# Altium PCB 20180623.PcbDoc (part 1 of 2)
Units mil, origin at the board's own origin, x right, y up, seen from the top; angles counter-clockwise.
Board outline 4375.58 x 1725.58 mil, 2 copper layers (Top Layer, Bottom Layer); 68 components, 90 nets, 323 pads, 77 vias.
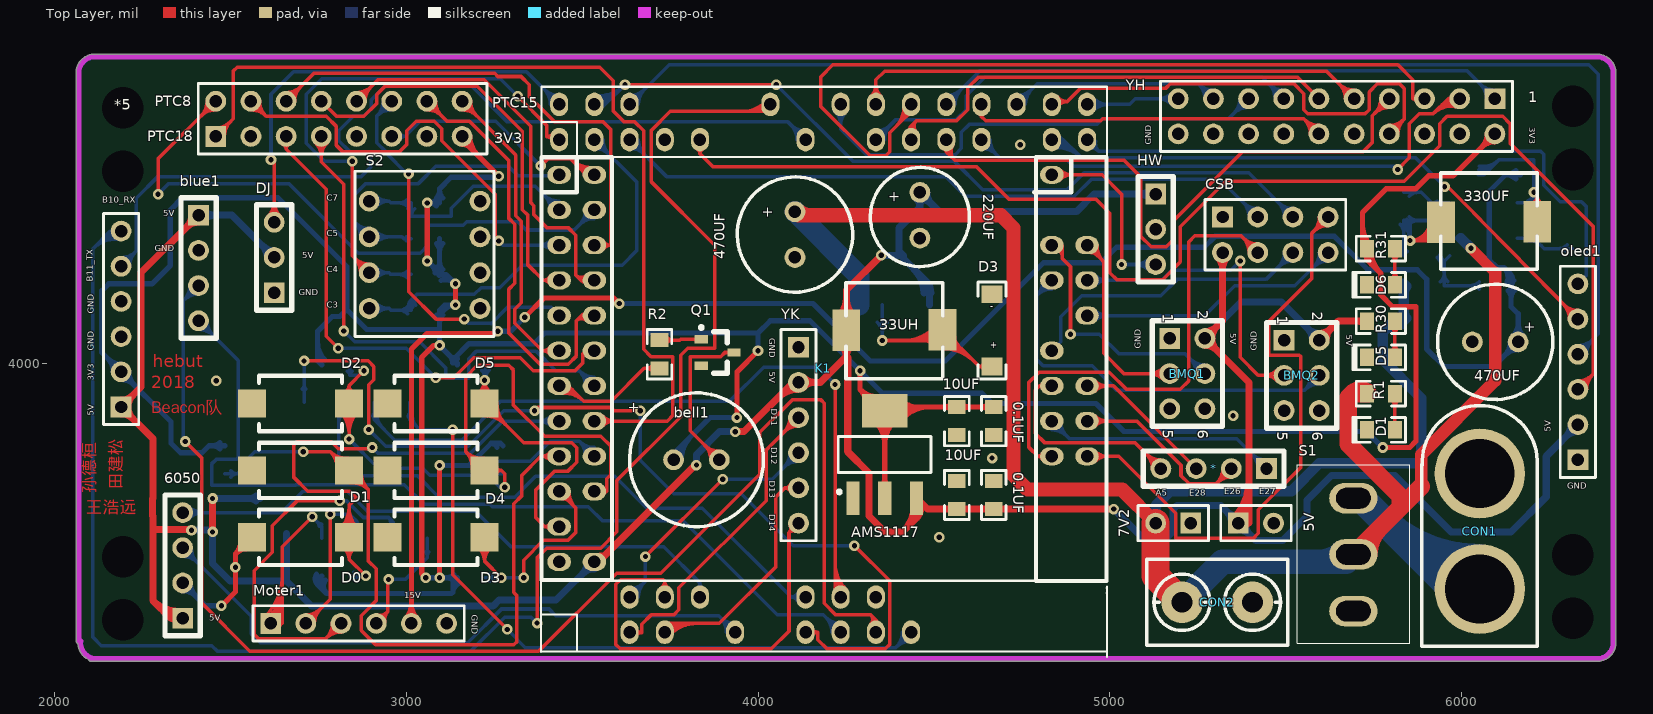
[diagram p0: Top Layer view]
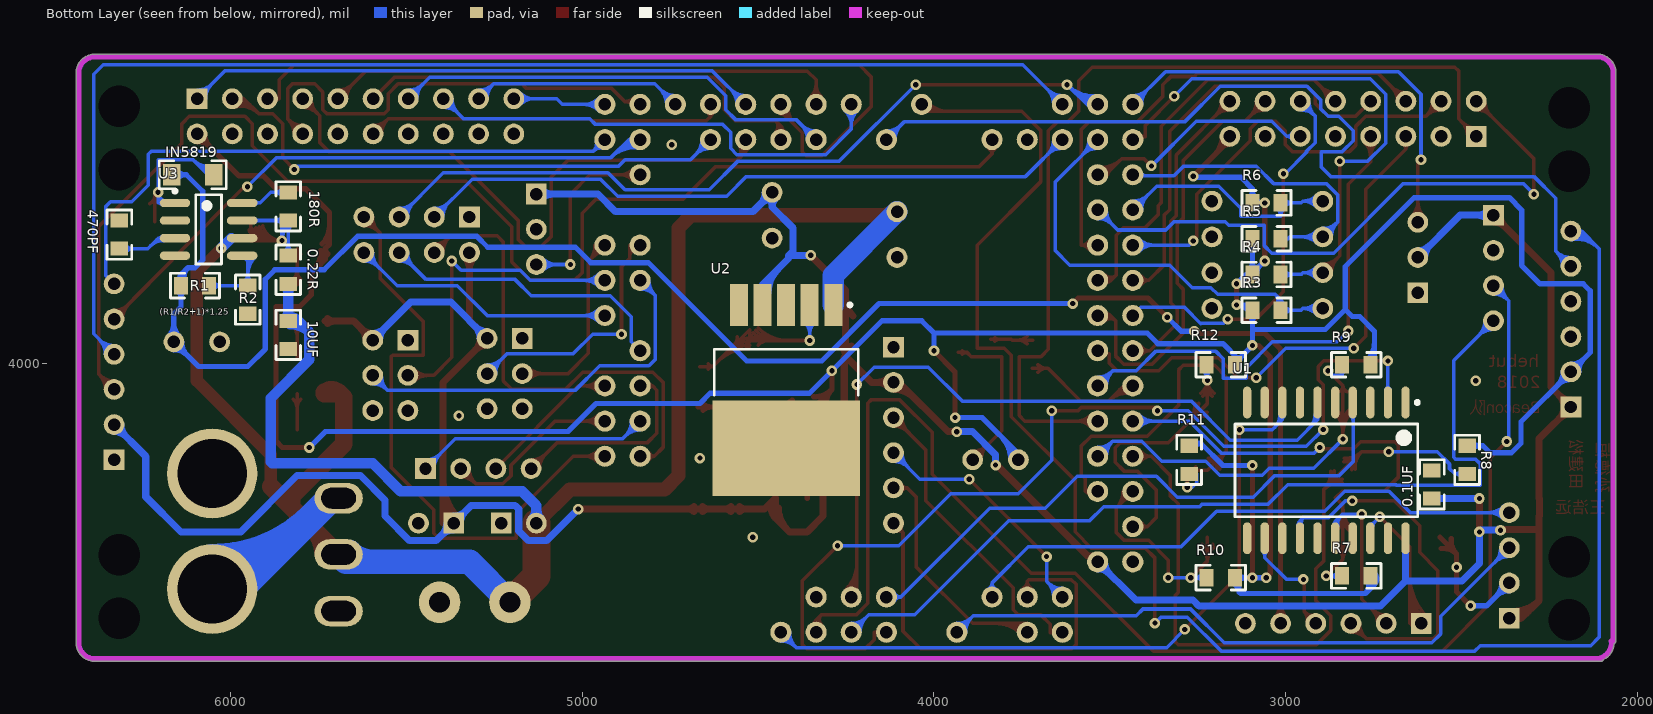
[diagram p1: Bottom Layer view, seen from below]

## Layer stack, top to bottom
Top Layer: signal copper 1.4
Dielectric: dielectric 12.6, FR-4, Dk 4.8
Bottom Layer: signal copper 1.4

## Board outline
2098.13,3156.95 cw(c2120,3205) 2067.25,3203.01 cw(c2070,3210) 2062.49,3210 2062.49,4820 cw(c2070,4820) 2062.79,4822.11 cw(c2069.72,4825) 2062.21,4825 cw(c2115,4825) 2109.17,4877.47 cw(c2115,4825) 2120.4,4877.52 6385,4877.52 cw(c6385,4824.72) 6437.79,4824.72 cw(c6385,4824.72) 6437.52,4819.32 6437.52,3207.02 cw(c6430.28,3205) 6437.79,3205 cw(c6385,3205) 6379.6,3152.49 2122.02,3152.49 cw(c2120,3159.72) 2120,3152.21 cw(c2120,3205) 2114.6,3152.49 2105,3152.49 cw(c2105,3160)

## Design rules (kind name [scope] priority, off if disabled: settings)
Clearance [All] p1: gap=8
ComponentClearance [All] p1: gap=0 collisioncheckmode=3 verticalgap=0 showdistances=FALSE
PolygonConnect [All] p1: connectstyle=Relief reliefconductorwidth=10 reliefentries=4 polygonreliefangle="90 Angle" airgapwidth=10
RoutingVias [All] p1: holewidth=15 width=30 viastyle="Through Hole" minholewidth=12 minwidth=24 maxholewidth=28 maxwidth=50
SolderMaskExpansion [All] p1: expansion=4
Width [All] p1: maxlimit=100 minlimit=10 preferedwidth=10 minimp=50.000000 maximp=50.000000 favimp=50.000000
27 further rules are at their usual default settings.

## Classes and differential pairs
component class 20180623: * *5 bell1 blue1 BMQ1 BMQ2 CON1 CON2 D1 D3 D5 D6 K1 Moter1 oled1 Q1 R1 R2 R3 R4 R5 R6 R7 R8 R9 R10 R11 R12 R30 R31 S1 S2 U1 U2 U3

## Components (designator, comment, footprint, x,y, rotation, side; value= is the part's Value field where it differs from the comment)
0.1UF "0.1uF" 0805 2585,3655 r270 bottom (schematic designator C1)
0.1UF "Cap Pol1" 0805 4670,3835 r270 top (schematic designator C4)
0.1UF "Cap" 0805 4670,3625 r270 top (schematic designator C6)
0.22R "0.22R" 0805 5835,4265 r270 bottom (schematic designator R13)
5V "PoweIn" HDR1X2 5385,3565 r0 top (schematic designator CON3)
7V2 "H1" HDR1X2 5210,3525 r180 top (schematic designator DY1)
10UF "Cap" 0805 4565,3625 r270 top (schematic designator C5)
10UF "Cap" 0805 4565,3835 r90 top (schematic designator C7)
10UF "10uF" 0805 5835,4080 r270 bottom (schematic designator C10)
33UH "Inductor" diangan 4225,4015 r180 top (schematic designator L2)
180R "180R" 0805 5835,4445 r270 bottom (schematic designator R14)
220UF "Cap Pol1" 220uf 4500,4395 r270 top (schematic designator C9)
330UF "330uH" diangan 6240,4480 r0 top (schematic designator L1)
470PF "470pF" 0805 6315,4365 r90 bottom (schematic designator C3)
470UF "470uF" 470UF 6080,4075 r180 top (schematic designator C2)
470UF "Cap Pol1" 470uF 4090,4350 r270 top (schematic designator C8)
6050 "6050" HDR1X4 2345,3405 r90 top (schematic designator *3)
* "Component_1" HDR1X4 5315,3680 r180 top
*5 "zzf" HDR2X8 2940,4710 r0 top
AMS1117 "AMS1117-3.3" lm1117-5v 4355,3745 r90 top (schematic designator 1)
bell1 "Bell" bezzer 3720,3735 r0 top
blue1 "blueteeth2" HDR1X4 2430,4290 r270 top
BMQ1 "encode_1" HDR2X3 5195,3880 r270 top
BMQ2 "encode_2" HDR2X3 5520,3875 r270 top
CON1 "PowerIn" DIZUO 6040,3515 r0 top
CON2 "PoweIn" KF301-2P 5305,3320 r270 top
CSB "Component_1" HDR2X4 5495,4405 r0 top (schematic designator 88)
D0 "SW-PB" BUTTON 2740,3525 r0 top (schematic designator S3)
D1 "RED" 0805LED 5770,3810 r180 top
D1 "SW-PB" BUTTON 2740,3715 r0 top (schematic designator S4)
D2 "SW-PB" BUTTON 2740,3905 r0 top (schematic designator S5)
D3 "IN5824" 1N5824 4820,4030 r90 top
D3 "SW-PB" BUTTON 3125,3525 r0 top (schematic designator S6)
D4 "SW-PB" BUTTON 3125,3715 r0 top (schematic designator S7)
D5 "SW-PB" BUTTON 3125,3905 r0 top (schematic designator S8)
D5 "RED" 0805LED 5770,4016 r180 top
D6 "RED" 0805LED 5770,4222 r180 top
DJ "DJ" HDR1X3 2605,4310 r90 top (schematic designator *4)
HW "hwcj" HDR1X3 5150,4370 r270 top (schematic designator 22)
IN5819 "IN5819" 1206(3216) 6161.42,4605 r0 bottom (schematic designator D2)
K1 "K60" K60_zk 3575,3890 r0 top
Moter1 "Motor" HDR1X6 2615,3260 r0 top
oled1 "OLED" HDR1X6 6330,3725 r90 top
Q1 "NPN9013" npn9013 3880,4040 r0 top
R1 "Res2" 0805 5770,3913 r180 top
R1 "1.3K" 0805 6100,4220 r0 bottom (schematic designator R15)
R2 "Res2" 0805 3720,4025 r90 top
R2 "100R" 0805 5950,4180 r270 bottom (schematic designator R16)
R3 "Res2" 0805 3055,4150 r0 bottom
R4 "Res2" 0805 3055,4251.67 r0 bottom
R5 "Res2" 0805 3055,4353.33 r0 bottom
R6 "Res2" 0805 3055,4455 r180 bottom
R7 "Res2" 0805 2800,3395 r180 bottom
R8 "Res2" 0805 2485,3725 r90 bottom
R9 "Res2" 0805 2800,3995 r180 bottom
R10 "Res2" 0805 3185,3390 r180 bottom
R11 "Res2" 0805 3275,3725 r90 bottom
R12 "Res2" 0805 3185,3995 r180 bottom
R30 "Res2" 0805 5770,4119 r180 top
R31 "Res2" 0805 5770,4325 r180 top
S1 "zk" SWITCH-MID 5570,3225 r90 top
S2 "SW-DIP4" BMKG 3550,4200 r90 top
U1 "74LS244" 74ls244DB 2885,3695 r270 bottom
U2 "LM2596-5" LM2596 4430,3925 r270 bottom
U3 "MC34063" MC34063 6061.42,4380 r180 bottom
YH "SXT" SXT 5595,4705 r180 top (schematic designator *1)
YK "YK" HDR1X6 4115,4045 r270 top (schematic designator *2)
? "UART" HDR1X6 2190,3875 r90 top

## Footprints (in the part's own frame and the unit in brackets; to place one, negate y for a bottom-side part, rotate by r counter-clockwise, add the part's x,y. Pads: shape width x height; smd on the part's side, far side on the other; paste and mask are expansions set on the pad)
1N5824 [mil]
  rect 50x60 smd: 1(-40,155) 2(165,155)
  silkscreen extent -75,115 200,195
74ls244DB [mm] "SOP, 20-Leads, Body 13.00x7.50mm, Pitch 1.27mm, IPC Medium Density"
  oval 2.3x0.6 smd: 1(-4.9,5.715) 2(-4.9,4.445) 3(-4.9,3.175) 4(-4.9,1.905) 5(-4.9,0.635) 6(-4.9,-0.635) 7(-4.9,-1.905) 8(-4.9,-3.175) 9(-4.9,-4.445) 10(-4.9,-5.715) 11(4.9,-5.715) 12(4.9,-4.445) 13(4.9,-3.175) 14(4.9,-1.905) 15(4.9,-0.635) 16(4.9,0.635) 17(4.9,1.905) 18(4.9,3.175) 19(4.9,4.445) 20(4.9,5.715)
  silkscreen extent -5.02,-6.6 3.35,6.69, body extent -3.8,-6.6 3.8,6.6, height 2.65
220uf [mm]
  round 1.5 hole 0.9: 1(-2.286,-1.016) 2(1.016,-1.016)
  silkscreen extent -4.08,-4.59 3.07,2.56
470UF [mm]
  round 1.5 hole 0.9: 1(-2.032,0.381) 2(1.27,0.381)
  silkscreen extent -4.54,-3.78 3.78,4.54
470uF [mm]
  round 1.5 hole 0.9: 1(-2.032,0.381) 2(1.27,0.381)
  silkscreen extent -4.54,-3.78 3.78,4.54
0805 [mil]
  rect 40x50 smd: 1(-40,0) 2(40,0)
  silkscreen extent -70,-35 70,35
0805LED [mil]
  rect 40x50 smd: 1(-40,0) 2(40,0)
  silkscreen extent -70,-35 80,35
1206(3216) [mil]
  rect 50x60 smd: 1(-115,70) 2(5,70)
  silkscreen extent -150,30 40,110
bezzer [mm]
  round 1.5 hole 0.9: 1(1.016,-0.254) 2(4.318,-0.254)
  silkscreen extent -2.16,-5.08 7.5,4.58
BMKG [mm]
  round 1.5 hole 0.9: 1(-1.143,8.636) 2(1.439,8.636) 3(4.022,8.636) 4(6.604,8.636) 5(6.604,16.637) 6(4.022,16.637) 7(1.439,16.637) 8(-1.143,16.637)
  silkscreen extent -3.18,7.62 8.76,17.65
BUTTON [mil]
  rect 80x80 smd: 1(-177.8,-20) 2(97.8,-20)
  silkscreen extent -158,-99 78,59
diangan [mil]
  rect 78.74x118.11 smd: 1(-299,-80) 2(-26,-78)
  silkscreen extent -300,-213 -25,60
DIZUO [mm]
  round 6.5 hole 5: 1(0.279,-3.988) 2(0.279,4.343)
  silkscreen extent -3.91,-8.13 4.45,9.25
HDR1X2 [mm]
  rect 1.5x1.5 hole 0.9: 1(-0.508,-0.508)
  round 1.5 hole 0.9: 2(2.032,-0.508)
  silkscreen extent -1.78,-1.78 3.3,0.76
HDR1X3 [mm]
  rect 1.5x1.5 hole 0.9: 1(-2.794,-0.508)
  round 1.5 hole 0.9: 2(-0.254,-0.508) 3(2.286,-0.508)
  silkscreen extent -4.06,-1.78 3.56,0.76
HDR1X4 [mm]
  rect 1.5x1.5 hole 0.9: 1(-3.302,-0.508)
  round 1.5 hole 0.9: 2(-0.762,-0.508) 3(1.778,-0.508) 4(4.318,-0.508)
  silkscreen extent -4.57,-1.78 5.59,0.76
HDR1X6 [mm] "Connector; Header; 6 Position"
  rect 1.5x1.5 hole 0.9: 1(0,0)
  round 1.5 hole 0.9: 2(2.54,0) 3(5.08,0) 4(7.62,0) 5(10.16,0) 6(12.7,0)
  silkscreen extent -1.27,-1.27 13.97,1.27
HDR2X3 [mm]
  rect 1.5x1.5 hole 0.9: 1(-4.826,-0.635)
  round 1.5 hole 0.9: 2(-4.826,1.905) 3(-2.286,-0.635) 4(-2.286,1.905) 5(0.254,-0.635) 6(0.254,1.905)
  silkscreen extent -6.1,-1.91 1.52,3.18
HDR2X4 [mm]
  rect 1.5x1.5 hole 0.9: 1(-4.445,0.254)
  round 1.5 hole 0.9: 2(-1.905,0.254) 3(0.635,0.254) 4(3.175,0.254) 5(3.175,-2.311) 6(0.635,-2.311) 7(-1.905,-2.311) 8(-4.445,-2.311)
  silkscreen extent -5.71,-3.58 4.44,1.52
HDR2X8 [mm]
  rect 1.5x1.5 hole 0.9: 1(-12.217,-1.676)
  round 1.5 hole 0.9: 2(-9.677,-1.676) 3(-7.137,-1.676) 4(-4.597,-1.676) 5(-2.057,-1.676) 6(0.483,-1.676) 7(3.023,-1.676) 8(5.563,-1.676) 9(5.563,0.864) 10(3.023,0.864) 11(0.483,0.864) 12(-2.057,0.864) 13(-4.597,0.864) 14(-7.137,0.864) 15(-9.677,0.864) 16(-12.217,0.864)
  silkscreen extent -13.49,-2.95 7.37,2.13
K60_zk [mm]
  oval 1.7x1.3 / inner round 1.524 / far side round 1.524 hole 0.9: 1(-3.556,16.383) 2(-1.016,16.383) 3(-3.556,13.843) 4(-1.016,13.843) 5(-3.556,11.303) 6(-1.016,11.303) 7(-3.556,8.763) 8(-1.016,8.763) 9(-3.556,6.223) 10(-1.016,6.223) 11(-3.556,3.683) 12(-1.016,3.683) 13(-3.556,1.143) 14(-1.016,1.143) 15(-3.556,-1.397) 16(-1.016,-1.397) 17(-3.556,-3.937) 18(-1.016,-3.937) 19(-3.556,-6.477) 20(-1.016,-6.477) 21(-3.556,-9.017) 23(-3.556,-11.557) 24(-1.016,-11.557) 63(34.544,-3.937) 64(32.004,-3.937) 65(34.544,-1.397) 66(32.004,-1.397) 67(34.544,1.143) 68(32.004,1.143) 70(32.004,3.683) 71(34.544,6.223) 73(34.544,8.763) 74(32.004,8.763) 75(34.544,11.303) 76(32.004,11.303) 80(32.004,16.383)
  oval 1.3x1.7 / inner round 1.524 / far side round 1.524 hole 0.9: 29(1.524,-16.637) 30(1.524,-14.097) 31(4.064,-16.637) 32(4.064,-14.097) 34(6.604,-14.097) 35(9.144,-16.637) 39(14.224,-16.637) 40(14.224,-14.097) 41(16.764,-16.637) 42(16.764,-14.097) 43(19.304,-16.637) 44(19.304,-14.097) 45(21.844,-16.637) 81(34.544,21.463) 82(34.544,18.923) 83(32.004,21.463) 84(32.004,18.923) 85(29.464,21.463) 87(26.924,21.463) 88(26.924,18.923) 89(24.384,21.463) 90(24.384,18.923) 91(21.844,21.463) 92(21.844,18.923) 93(19.304,21.463) 94(19.304,18.923) 95(16.764,21.463) 98(14.224,18.923) 99(11.684,21.463) 104(6.604,18.923) 106(4.064,18.923) 107(1.524,21.463) 108(1.524,18.923) 109(-1.016,21.463) 110(-1.016,18.923) 111(-3.556,21.463) 112(-3.556,18.923)
  silkscreen extent -4.87,-18.42 35.99,22.73
KF301-2P [mm]
  round 3 hole 1.5: 1(0,-2.54) 2(0,2.54)
  silkscreen extent -3.1,-5.08 3.1,5.08
lm1117-5v [mm]
  rect 2.4x0.95 smd: 1(-3.277,2.173) 2(-3.277,-0.127) 3(-3.277,-2.427)
  rect 2.4x3.3 smd: 2(3.023,-0.127)
  silkscreen extent -2.95,-3.48 1.17,3.28, body extent -1.63,-3.48 1.37,3.22, height 1.8
LM2596 [mm]
  rect 3.05x1.3 smd: 1(-6.1,3.654) 2(-6.1,1.954) 3(-6.1,0.254) 4(-6.1,-1.446) 5(-6.1,-3.146)
  rect 6.9x10.65 smd: 6(4.25,0.254)
  silkscreen extent -6.22,-4.95 0.4,5.45
MC34063 [mm] "SOIC, 8-Leads, Body 4.90x3.90mm, Pitch 1.27mm, IPC Medium Density"
  oval 2.2x0.6 smd: 1(-2.425,1.905) 2(-2.425,0.635) 3(-2.425,-0.635) 4(-2.425,-1.905) 5(2.425,-1.905) 6(2.425,-0.635) 7(2.425,0.635) 8(2.425,1.905)
  silkscreen extent -2.55,-2.5 0.93,2.88, body extent -2,-2.5 2,2.5, height 1.5
npn9013 [mm]
  rect 0.95x0.6 smd: 1(-1.048,-1.204) 2(-1.048,0.696) 3(1.302,-0.254)
  silkscreen extent -1.17,-1.75 0.83,1.67, body extent -0.57,-1.75 0.83,1.25, height 1.1
SWITCH-MID [mm]
  oval 2.2x3.5 hole 1.5 slot 2.5 at 90 deg: 1(9.931,-3.099) 2(5.867,-3.099) ""(1.778,-3.099)
  silkscreen extent -0.56,-7.16 12.34,0.94
SXT [mm]
  rect 1.5x1.5 hole 0.9: 1(-12.675,-1.168)
  round 1.5 hole 0.9: 2(-10.135,-1.168) 3(-7.595,-1.168) 4(-5.055,-1.168) 5(-2.515,-1.168) 6(0.025,-1.168) 7(2.565,-1.168) 8(5.105,-1.168) 9(7.645,-1.168) 10(10.185,-1.168) 11(10.185,1.372) 12(7.645,1.372) 13(5.105,1.372) 14(2.565,1.372) 15(0.025,1.372) 16(-2.515,1.372) 17(-5.055,1.372) 18(-7.595,1.372) 19(-10.135,1.372) 20(-12.675,1.372)
  silkscreen extent -13.94,-2.44 11.46,2.64

## Part data
0.1UF 470PF: library part "Cap Semi", "Capacitor (Semiconductor SIM Model)"
0.1UF 220UF 470UF: "Polarized Capacitor (Radial)"
0.1UF 10UF 10UF: "Capacitor"
0.22R 180R R1 R2: library part Res2, "Resistor"
5V CON1 CON2: library part "Header 2", "Header, 2-Pin"
10UF 470UF: library part "Cap Pol3", "Polarized Capacitor (Surface Mount)"
330UF: library part Inductor, "Inductor"
AMS1117: library part LT1117-3.3
bell1: "Electrical Bell"
blue1: library part blueteeth
BMQ1 BMQ2: library part encode
D0 D1 D2 D3 D4 D5: "Switch"
D1 D5 D6: library part LED2, "Typical RED, GREEN, YELLOW, AMBER GaAs LED"
DJ: library part 舵机
IN5819: library part Diode, "Default Diode"
Q1: library part 2N3904, "NPN General Purpose Amplifier"
R1 R2 R3 R4 R5 R6 R7 R8 R9 R10 R11 R12 R30 R31: "Resistor"
S1: library part SW-SPST, "Single-Pole, Single-Throw Switch"
S2: "DIP Switch"
U2: library part LM2596
YH: library part 摄像头
YK: library part 遥控

## Free pads (board coordinates)
  round 65 hole 118.11: 4(2195,3270) 4(2195,3450) 4(2195,4545) 4(2195,4725) 4(6315,3275) 4(6315,3455) 4(6315,4550) 4(6315,4730)

## Via types
v1: diameter 30, hole 15, Top Layer to Bottom Layer, 77 vias

## Nets (pads, with @x,y where several pads share a name; then routed paths per layer and width w, separated by ;. In a path a pad name is that pad's centre, name@x,y a point inside that pad or via, vN(x,y) a via of type N, cw(c..) or ccw(c..) an arc to the next point about the centre after c; other vN are vias at no path point)
3V3: 0.1UF.1@4670,3875 10UF.2@4565,3875 *5.8 ?.2 AMS1117.2 bell1.1 R3.2 R4.2 R5.2 R6.1 R7.2 R8.2 R9.2 R10.2 R11.2 R12.2 R31.2 YH.20 | length 12875.3
  Top Layer w15: v1(3056,3390) 3044,3402 3044,4016 3078,4050 v1(3095,4050) ; v1(3060,4290) 3055,4295 3060,4295 v1(3060,4455) ; v1(3095,3390) v1(3095,3709) ; v1(3140,4165) v1(3140,4225) ; *5.8@3159,4621.97 cw(c3159,4590.52) 3181.24,4612.76 ; *5.8@3159,4644 3159,4635 v1(3263,4531) ; *5.8@3166.03,4644 ccw(c3204.72,4644) 3177.36,4616.64 ; *5.8@3181.03,4644 ccw(c3255.93,4644) 3202.97,4591.03 ; v1(3940,3845) 3940,3975 v1(4000,4035) ; v1(4290,3978) 4290,3925 ; AMS1117.2@4303.83,3874.06 ccw(c4252.47,3887.46) 4290,3925 ; AMS1117.2@4308.51,3906.49 cw(c4281.82,3879.8) AMS1117.2@4318.34,3870.27 ; AMS1117.2@4331.9,3835.91 cw(c4264.05,3768.07) 4360,3768.07 cw(c4455.95,3768.07) AMS1117.2@4388.1,3835.91 ; AMS1117.2@4341.93,3903.76 cw(c4341.28,3976.28) 4290,3925 ; AMS1117.2@4342.5,3846.52 cw(c4300.26,3804.28) 4360,3804.28 cw(c4419.74,3804.28) AMS1117.2@4377.5,3846.52 ; AMS1117.2@4352.08,3652.45 ccw(c4332.96,3671.57) 4360,3671.57 ccw(c4387.04,3671.57) AMS1117.2@4367.92,3652.45 ; AMS1117.2@4360,3615.98 AMS1117.2@4360,3855 ; AMS1117.2@4393.45,3883.11 ccw(c4427.76,3924.73) 4432.93,3871.04 ; AMS1117.2@4396.81,3848.28 cw(c4447.39,3806.59) 4441.1,3871.83 ; AMS1117.2@4402.99,3894.69 ccw(c4460.33,3964.25) 4468.98,3874.52 ; AMS1117.2@4408.39,3838.74 cw(c4486.91,3774.02) 4477.15,3875.3 ; 10UF.2@4551.16,3866.16 ccw(c4529.82,3844.82) 4529.82,3875 ccw(c4529.82,3905.18) 10UF.2@4551.16,3883.84 ; 10UF.2@4578.84,3866.16 cw(c4600.18,3844.82) 4600.18,3875 cw(c4600.18,3905.18) 10UF.2@4578.84,3883.84 ; 0.1UF.1@4656.16,3866.16 ccw(c4634.82,3844.82) 4634.82,3875 ccw(c4634.82,3905.18) 0.1UF.1@4656.16,3883.84 ; 0.1UF.1@4670,3875 10UF.2@4565,3875 4473.98,3875 AMS1117.2@4360,3864.02 AMS1117.2@4360,3855 ; 5718,4352.94 ccw(c5752.94,4352.94) R31.2@5728.23,4328.23 ; 5718,4389.15 ccw(c5789.15,4389.15) R31.2@5738.84,4338.84 ; R31.2@5722.19,4310.24 cw(c5709.21,4294) 5730,4294 ; R31.2@5727.5,4320 ccw(c5784.23,4320) 5744.12,4279.88 ; R31.2@5737.81,4310.24 ccw(c5750.79,4294) 5730,4294 ; R31.2@5742.5,4320 ccw(c5835.45,4320) 5769.72,4254.28 ; v1(5775,3760) 5852,3760 5870,3778 5870,4160 5803,4160 5770,4193 5770,4254 5730,4294 ; YH.20@6071.97,4651 cw(c6018.79,4651) 6056.4,4613.4 cw(c6094,4575.79) YH.20@6094,4628.97 ; YH.20@6094,4651 5974.92,4531.92 5905.59,4531.92 5868.67,4495 5785,4495 5718,4428 5718,4337 R31.2@5730,4325 5730,4294 ; 4290,3925 AMS1117.2@4360,3855
  Bottom Layer w15: ?.2@2167.97,3975 ccw(c2114.79,3975) 2152.4,4012.6 ccw(c2190,4050.21) ?.2@2190,3997.03 ; ?.2@2190,3952.97 cw(c2190,3899.79) 2227.6,3937.4 cw(c2265.21,3975) ?.2@2212.03,3975 ; R8.2@2471.16,3756.16 ccw(c2449.82,3734.82) 2449.82,3765 ccw(c2449.82,3795.18) R8.2@2471.16,3773.84 ; R8.2@2485,3765 2440,3765 2420,3745 2359,3745 2332,3772 2332,3833 ?.2@2190,3975 2135,4030 2135,4205 2155,4225 2278,4225 2330,4277 2330,4435 2365,4470 2635,4470 2831.23,4273.77 2831.23,4152 ; R7.2@2745.5,3399.8 ccw(c2764.52,3386.94) R7.2@2748.29,3370.71 ; 2748,4022.93 ccw(c2782.93,4022.93) R9.2@2758.23,3998.23 ; 2748,4059.15 ccw(c2819.15,4059.15) R9.2@2768.84,4008.84 ; R7.2@2757.93,3391.4 ccw(c2779.86,3376.58) 2761.14,3357.86 ; R7.2@2760,3395 2748,3383 2748,3371 2774,3345 ; R9.2@2760,3995 2748,4007 2748,4090 2790,4132 2811.23,4132 2831.23,4152 ; R7.2@2770.36,3383 ccw(c2795.21,3366.21) 2774,3345 ; v1(3056,3390) v1(3095,3390) R10.2@3145,3390 3133,3378 3133,3350.09 3127.91,3345 2774,3345 ; v1(3060,4290) R4.2@3095,4255 ; v1(3060,4455) R6.1@3095,4455 3095,4495 3127.8,4527.8 3259.8,4527.8 v1(3263,4531) ; 3070.82,4279.18 ccw(c3095,4303.37) R4.2@3095,4269.17 ; 3074.84,4275.16 cw(c3056.34,4256.67) R4.2@3082.5,4256.67 ; R3.2@3086.16,4136.16 cw(c3064.82,4114.82) 3095,4114.82 cw(c3125.18,4114.82) R3.2@3103.84,4136.16 ; R4.2@3086.16,4265.5 ccw(c3064.82,4286.84) 3095,4286.84 ccw(c3125.18,4286.84) R4.2@3103.84,4265.5 ; R5.2@3086.16,4339.5 cw(c3064.82,4318.16) 3095,4318.16 cw(c3125.18,4318.16) R5.2@3103.84,4339.5 ; R6.1@3086.16,4446.16 ccw(c3064.82,4424.82) 3064.82,4455 ccw(c3064.82,4485.18) R6.1@3086.16,4463.84 ; R6.1@3086.16,4468.84 ccw(c3064.82,4490.18) 3095,4490.18 ccw(c3125.18,4490.18) R6.1@3103.84,4468.84 ; R4.2@3094.22,4249.04 cw(c3102.96,4222.45) 3122.76,4242.24 ; v1(3095,3709) 3179,3709 3242,3772 ; R5.2@3095,4353.33 R4.2@3095,4255 ; R4.2@3098.9,4234.79 cw(c3111.49,4196.5) v1(3140,4225) 3113.33,4251.67 R4.2@3095,4251.67 R4.2@3095,4255 ; R3.2@3105,4147.5 cw(c3140,4121.25) v1(3140,4165) 3110,4165 R3.2@3095,4150 3095,4095 ; R12.2@3132.5,4000 ccw(c3102.32,4000) 3123.66,4021.34 ccw(c3145,4042.68) R12.2@3145,4012.5 ; 3133,3348.08 cw(c3160.56,3348.08) R10.2@3149.86,3373.48 ; R10.2@3136.16,3381.16 ccw(c3114.82,3359.82) 3114.82,3390 ccw(c3114.82,3420.18) R10.2@3136.16,3398.84 ; R12.2@3145,3995 R12.2@3145,4000 ; R11.2@3258.28,3760.67 ccw(c3242,3754.65) 3242,3772 ; R11.2@3275,3765 3268,3772 3242,3772 ; bell1.1@3760,3725 3760,3742 3863,3845 v1(3940,3845) ; bell1.1@3767.03,3725 cw(c3825.03,3725) 3784.02,3766.02 ; bell1.1@3782.03,3725 cw(c3876.25,3725) 3809.62,3791.62 ; v1(4000,4035) 4000,4085 ; v1(5775,3760) 5729.5,3805.5 5039.5,3805.5 4960,3885 4665,3885 4636,3914 4354,3914 v1(4290,3978) 4148,4120 4035,4120 4000,4085 ; 2831.23,4152 2888.23,4095 3095,4095 ; 3095,4095 v1(3095,4050) R12.2@3145,4000 ; R12.2@3145,4000 3134.27,4010.73 3178.54,4055 3364,4055 3394,4085 4000,4085
5V: 0.1UF.2@2585,3615 0.1UF.2@4670,3585 5V.1 10UF.2@4565,3585 33UH.2 220UF.1 6050.1 ?.1 AMS1117.3 blue1.1 BMQ1.2 BMQ2.2 CSB.8 DJ.2 HW.1 K1.24 oled1.2 R30.2 U1.20 U2.4 YK.2 | length 13009.3
  Top Layer w20: ?.1@2190,3855.47 cw(c2190,3808.33) 2223.34,3841.66 cw(c2256.67,3875) 2209.53,3875 cw(c2256.67,3875) 2223.34,3908.34 cw(c2190,3941.67) ?.1@2190,3894.53 ; 2310.49,3294.51 ccw(c2359.3,3343.32) 6050.1@2365.04,3274.53 ; 6050.1@2348.38,3264.74 ccw(c2330,3253.4) 2330,3275 ; 6050.1@2348.38,3285.26 cw(c2330,3296.6) 2330,3275 ; 6050.1@2363.38,3294.46 cw(c2354.61,3399.6) 2280,3325 ; 6050.1@2365,3275 2330,3275 ; v1(2390,3525) 2387.53,3527.47 2282.53,3527.47 2280,3530 ; blue1.1@2390.47,4420 cw(c2343.33,4420) 2376.66,4386.66 cw(c2410,4353.33) blue1.1@2410,4400.47 ; blue1.1@2410,4420 2247,4257 2247,3932 ?.1@2190,3875 2280,3785 2280,3615.18 2279.2,3614.38 2279.2,3565.8 2280,3565 2280,3530 ; v1(2450,3520) v1(2450,3615) ; K1.24@3535,3435 3551,3451 3562.53,3451 3821.53,3710 v1(3825,3710) ; v1(3935,3805) 3960,3805 4100,3945 YK.2@4115,3945 4176.78,3945 4251,4019.22 ; 4056.06,3901.06 cw(c4115,3842.12) YK.2@4115,3925.47 ; YK.2@4128.81,3931.19 cw(c4162.14,3897.86) 4162.14,3945 cw(c4162.14,3992.14) YK.2@4128.81,3958.81 ; 33UH.2@4230.23,4133.45 ccw(c4180.09,4183.59) 4251,4183.59 ccw(c4321.91,4183.59) 33UH.2@4271.77,4133.45 ; 33UH.2@4235.01,4048.68 cw(c4215.88,4019.23) 4251,4019.23 cw(c4286.12,4019.23) 33UH.2@4266.99,4048.68 ; v1(4350,4306) 4251,4207 33UH.2@4251,4093 4251,4019.22 ; 4416.3,3525.74 ccw(c4354.6,3587.44) AMS1117.3@4441.85,3587.44 ; AMS1117.3@4444.4,3581.29 cw(c4429.55,3566.44) 4450.55,3566.44 cw(c4471.56,3566.44) AMS1117.3@4456.7,3581.29 ; 4450.44,3559.89 ccw(c4422.88,3587.44) AMS1117.3@4461.85,3587.44 ; 10UF.2@4552.93,3577.93 ccw(c4535.86,3560.86) 4535.86,3585 ccw(c4535.86,3609.14) 10UF.2@4552.93,3592.07 ; 10UF.2@4577.07,3577.93 cw(c4594.14,3560.86) 4594.14,3585 cw(c4594.14,3609.14) 10UF.2@4577.07,3592.07 ; 0.1UF.2@4657.93,3577.93 ccw(c4640.86,3560.86) 4640.86,3585 ccw(c4640.86,3609.14) 0.1UF.2@4657.93,3592.07 ; 0.1UF.2@4682.07,3577.93 cw(c4699.14,3560.86) 4699.14,3585 cw(c4699.14,3609.14) 0.1UF.2@4682.07,3592.07 ; v1(5011,3585) 0.1UF.2@4670,3585 10UF.2@4565,3585 4481.54,3585 AMS1117.3@4450.55,3615.98 4450.55,3560 4410.29,3519.74 4360.26,3519.74 4315,3565 4315,3688 4255,3748 4255,4015.22 4251,4019.22 ; BMQ1.2@5270,4050.47 cw(c5270,4003.33) 5303.34,4036.66 cw(c5336.67,4070) 5289.53,4070 cw(c5336.67,4070) 5303.34,4103.34 cw(c5270,4136.67) BMQ1.2@5270,4089.53 ; CSB.8@5306.19,4300.19 cw(c5272.86,4266.86) 5320,4266.86 cw(c5367.14,4266.86) CSB.8@5333.81,4300.19 ; CSB.8@5320,4314 5320,4120 BMQ1.2@5270,4070 5395,3945 5395,3545 ; 5V.1@5351.19,3558.81 ccw(c5245.43,3664.57) 5395,3664.57 ; 5V.1@5365,3545 5395,3545 ; 5V.1@5365.33,3544.67 ccw(c5293.71,3616.29) 5395,3616.29 ; 5V.1@5379.48,3530.52 ccw(c5342,3568) 5395,3568 ; 5V.1@5382.86,3537.1 cw(c5395,3531.72) 5395,3545 ; 5V.1@5382.86,3552.9 ccw(c5395,3558.28) 5395,3545 ; BMQ2.2@5595,4065 5649,4119 R30.2@5730,4119 ; BMQ2.2@5595,4084.53 ccw(c5595,4131.67) 5628.34,4098.34 ccw(c5661.67,4065) BMQ2.2@5614.53,4065 ; R30.2@5722.93,4111.93 ccw(c5705.86,4094.86) 5705.86,4119 ccw(c5705.86,4143.14) R30.2@5722.93,4126.07 ; 2280,3325 2280,3530 ; 2280,3325 2330,3275
  Bottom Layer w20: v1(2390,3525) 2445,3525 v1(2450,3520) 2450,3430 2499,3381 2660,3381 ; blue1.1@2410,4420 2505,4420 DJ.2@2625,4300 ; blue1.1@2423.81,4406.19 cw(c2457.14,4372.86) 2457.14,4420 cw(c2457.14,4467.14) blue1.1@2423.81,4433.81 ; v1(2450,3615) 0.1UF.2@2585,3615 ; 0.1UF.2@2572.93,3607.93 ccw(c2555.86,3590.86) 2555.86,3615 ccw(c2555.86,3639.14) 0.1UF.2@2572.93,3622.07 ; DJ.2@2605.47,4300 ccw(c2558.33,4300) 2591.66,4333.34 ccw(c2625,4366.67) DJ.2@2625,4319.53 ; U1.20@2660,3516 U1.20@2660,3502.09 2660,3381 ; K1.24@3515,3435 cw(c3466.72,3435) 3500.86,3400.86 cw(c3535,3366.72) K1.24@3535,3415 ; K1.24@3535,3435 3426.21,3326.21 3263.68,3326.21 3247.47,3310 2731,3310 2660,3381 ; v1(3825,3710) 3825,3739.5 3890.5,3805 v1(3935,3805) ; v1(4350,4306) 4412,4306 4413,4305 ; 4443.77,4266.16 cw(c4377.22,4199.61) U2.4@4471.34,4199.61 ; 220UF.1@4447.41,4470.07 cw(c4424.6,4443) 4460,4443 ; 220UF.1@4460,4465.47 cw(c4460,4418.33) 4493.34,4451.66 cw(c4526.67,4485) 220UF.1@4479.53,4485 ; 220UF.1@4472.59,4470.07 ccw(c4495.4,4443) 4460,4443 ; 4477.92,4232.01 cw(c4445.51,4199.61) U2.4@4491.34,4199.61 ; U2.4@4486.93,4165.16 4486.93,4223 4413,4296.93 4413,4305 ; v1(5011,3585) 5101,3495 5152.53,3495 5180,3522.47 5180,3585 5190,3595 5315,3595 5V.1@5365,3545 5415,3495 5490,3495 5560,3565 5560,3610 5630,3680 5810,3680 5970,3520 6140,3520 6240,3620 6240,3735 oled1.2@6330,3825 ; HW.1@5116.19,4466.19 ccw(c5082.86,4432.86) 5082.86,4480 ccw(c5082.86,4527.14) HW.1@5116.19,4493.81 ; HW.1@5130,4480 4955,4480 4905,4430 4515,4430 220UF.1@4460,4485 4460,4443 ; BMQ1.2@5270,4070 5373,4173 5487,4173 BMQ2.2@5595,4065 ; BMQ1.2@5270,4089.53 ccw(c5270,4136.67) 5303.34,4103.34 ccw(c5336.67,4070) BMQ1.2@5289.53,4070 ; 5V.1@5345.47,3545 ccw(c5298.33,3545) 5331.66,3578.34 ccw(c5365,3611.67) 5V.1@5365,3564.53 ; 5V.1@5365,3525.47 cw(c5365,3478.33) 5398.34,3511.66 cw(c5431.67,3545) 5V.1@5384.53,3545 ; BMQ2.2@5575.47,4065 ccw(c5528.33,4065) 5561.66,4098.34 ccw(c5595,4131.67) BMQ2.2@5595,4084.53 ; oled1.2@6310.47,3825 cw(c6263.33,3825) 6296.66,3791.66 cw(c6330,3758.33) oled1.2@6330,3805.47 ; 4413,4305 4400,4318 4400,4383 4460,4443
7V2: 0.22R.2 7V2.2 10UF.1@5835,4120 470UF.1@4105,4430 CON2.1 R1.2@5730,3913 S1.2 U2.1 U3.6 | length 6625.8
  Top Layer w20: 470UF.1@4118.81,4416.19 cw(c4152.14,4382.86) 4152.14,4430 cw(c4152.14,4477.14) 470UF.1@4118.81,4443.81 ; 7V2.2@5110.47,3545 ccw(c5063.33,3545) 5096.66,3578.34 ccw(c5130,3611.67) 7V2.2@5130,3564.53
  Top Layer w30: v1(6026,4326) 6095,4257
  Top Layer w35: 5885,3649 5885,3740 6095,3950 6095,4257
  Top Layer w40: 470UF.1@4105,4430 4115,4420 4690,4420 4726,4384 4726,3680 4766,3640 5035,3640 7V2.2@5130,3545
  Top Layer w50: S1.2@5692,3456 5825.5,3589.5 ; R1.2@5730,3913 5687,3913 ; R1.2@5732.15,3912.52 ccw(c5711.32,3868.69) 5677,3903 ; R1.2@5732.85,3917.11 ccw(c5712.38,3887.62) 5687,3913 ; S1.2@5735.9,3456 cw(c5841.88,3456) 5766.94,3530.94 ; 5885,3649 5825.5,3589.5 ; 5677,3903 5687,3913 ; 5677,3903 5677,3770 5825.5,3621.5 5825.5,3589.5
  Top Layer w80: 7V2.2@5130,3545 5130,3395 CON2.1@5205,3320
  Bottom Layer w10: U3.6@5965.95,4355 U3.6@5997,4355
  Bottom Layer w30: 7V2.2@5119.73,3555.27 ccw(c5094.93,3580.07) 5130,3580.07 ccw(c5165.07,3580.07) 7V2.2@5140.27,3555.27 ; 7V2.2@5130,3545 5130,3595 5170,3635 5515,3635 5595,3715 5880,3715 5885,3720 5885,3900 5775,4010 5775,4088 ; 5808.13,4121.13 cw(c5829.56,4099.69) 10UF.1@5830.22,4130 ; 10UF.1@5822.69,4113.18 ccw(c5807,4098.55) 5807,4120 ; 10UF.1@5822.69,4126.82 cw(c5807,4141.45) 5807,4120 ; 10UF.1@5827.93,4127.07 ccw(c5810.86,4144.14) 5835,4144.14 ccw(c5859.14,4144.14) 10UF.1@5842.07,4127.07 ; 0.22R.2@5827.93,4217.93 cw(c5810.86,4200.86) 5835,4200.86 cw(c5859.14,4200.86) 0.22R.2@5842.07,4217.93 ; 10UF.1@5829.78,4110 ccw(c5828.16,4034.85) 5775,4088 ; 0.22R.2@5835,4225 10UF.1@5835,4120 5807,4120 ; U3.6@5997,4355 v1(6026,4326) ; 5775,4088 5807,4120
  Bottom Layer w60: 470UF.1@4105,4430 4286.14,4248.86 U2.1@4286.14,4165.16
  Bottom Layer w70: CON2.1@5205,3320 5320,3435 5671,3435 S1.2@5692,3456 ; 5595.66,3435 ccw(c5595.66,3526.75) S1.2@5660.54,3461.87
12V: 470UF.1@6160,4060 IN5819.2 Moter1.5 R1.2@6140,4220 | length 5655.8
  Top Layer w15: Moter1.5@2999.42,3275.58 ccw(c2961.82,3313.18) 3015,3313.18 ccw(c3068.18,3313.18) Moter1.5@3030.58,3275.58 ; Moter1.5@3015,3260 3015,4040 3059,4084 3254,4084 v1(3260,4090) ; v1(3337,4130) 3392,4185 3590,4185 v1(3606,4169)
  Bottom Layer w15: v1(3260,4090) 3297,4090 v1(3337,4130) ; v1(3606,4169) 4156,4169 4319,4006 4532,4006 4811,4285 4975,4285 5019,4329 5268,4329 5299,4360 5638,4360 5733,4265 5873,4265 5900,4238 5900,4040 5950,3990 6090,3990 470UF.1@6160,4060 6160,4140 6140,4160 R1.2@6140,4220 ; R1.2@6128.41,4229.68 ccw(c6092.99,4243.99) 6120,4271 ; R1.2@6132.19,4234.76 ccw(c6119.21,4251) 6140,4251 ; 6136.03,4254.97 cw(c6115.82,4234.77) R1.2@6142.32,4224.06 ; 470UF.1@6137.97,4060 cw(c6084.79,4060) 6122.4,4022.4 cw(c6160,3984.79) 470UF.1@6160,4037.97 ; 6140,4175 R1.2@6140,4220 ; 470UF.1@6144.42,4075.58 ccw(c6106.82,4113.18) 6160,4113.18 ccw(c6213.18,4113.18) 470UF.1@6175.58,4075.58 ; R1.2@6147.81,4234.76 cw(c6160.79,4251) 6140,4251 ; IN5819.2@6153.87,4522.8 ccw(c6125,4494.74) 6125,4535 ; IN5819.2@6153.87,4547.2 cw(c6125,4575.26) 6125,4535 ; IN5819.2@6166.42,4535 6125,4535 ; 6120,4271 6100,4271 6078,4293 6078,4488 6125,4535 ; 6120,4271 6140,4251 ; 6140,4184.82 cw(c6170.18,4184.82) 6148.84,4206.16 ccw(c6170.18,4184.82) 6140,4184.82 ; 6140,4184.82 ccw(c6109.82,4184.82) 6131.16,4206.16 cw(c6109.82,4184.82) 6140,4184.82 ; R1.2@6140,4220 6140,4251
GND: 0.1UF.1@2585,3695 0.1UF.1@4670,3665 0.1UF.2@4670,3795 5V.2 7V2.1 10UF.1@4565,3665 10UF.1@4565,3795 10UF.2@5835,4040 220UF.2 470PF.2 470UF.2 6050.2 *5.2 *5.7 ?.3 ?.4 AMS1117.1 blue1.2 BMQ1.1 BMQ2.1 CON1.2 CON2.2 CSB.1 D0.1 D1.1@2562.2,3695 D1.2@5730,3810 D2.1 D3.1@2947.2,3505 D3.2@4665,4195 D4.1 D5.1@2947.2,3885 D5.2@5730,4016 D6.2 DJ.1 HW.2 K1.23 Moter1.6 oled1.1 Q1.1 R2.2@5950,4140 S2.1 S2.2 S2.3 S2.4 U1.1 U1.3 U1.5 U1.7 U1.9 U1.10 U1.11 U1.13 U1.15 U1.17 U1.19 U2.3 U2.5 U2.6 U3.2 U3.4 YH.11 YK.1 | length 546.4
  Top Layer w15: v1(2475,3310) 2515,3350 v1(2515,3420) 2515,3457.8 ; D0.1@2529.94,3501.08 cw(c2478.02,3494.78) 2515,3457.8 ; D0.1@2558.29,3472.74 ccw(c2551.99,3420.81) 2515,3457.8 ; D0.1@2562.2,3505 2515,3457.8
  Bottom Layer w15: 6050.2@2365,3352.97 cw(c2365,3299.79) 2402.6,3337.4 cw(c2440.21,3375) 6050.2@2387.03,3375 ; 6050.2@2365,3375 2430,3310 v1(2475,3310)
  other v1: 4515,3505 4665,3730 2460,3950
"MOTOR1 IN1": Moter1.2 U1.16 | length 698.1
  Top Layer w10: Moter1.2@2715,3260 2784,3329 v1(2784,3570) ; Moter1.2@2715,3274.53 ccw(c2715,3309.6) 2739.8,3284.8 ccw(c2764.6,3260) Moter1.2@2729.53,3260 ; Moter1.2@2715,3284.53 ccw(c2715,3343.74) 2756.87,3301.87 ccw(c2798.74,3260) Moter1.2@2739.53,3260
  Bottom Layer w10: v1(2784,3570) 2840,3570 ; U1.16@2853.2,3535.87 ccw(c2808.02,3538.02) 2840,3570 ; U1.16@2855.67,3540.8 ccw(c2848.08,3550) 2860,3550 ; 2855.99,3554.01 cw(c2838.55,3536.57) U1.16@2863.19,3535.4 ; U1.16@2860,3502.09 2860,3550 ; U1.16@2864.33,3540.8 cw(c2871.92,3550) 2860,3550 ; 2840,3570 2860,3550
"MOTOR1 IN2": Moter1.1 U1.18 | length 1020.1
  Top Layer w10: Moter1.1@2597.66,3277.34 ccw(c2476.12,3398.88) 2648,3398.88 ; Moter1.1@2604.73,3270.27 ccw(c2500.26,3374.74) 2648,3374.74 ; Moter1.1@2611.8,3263.2 ccw(c2524.4,3350.6) 2648,3350.6 ; Moter1.1@2615,3260 2648,3260 ; Moter1.1@2618.87,3256.13 ccw(c2548.54,3326.46) 2648,3326.46 ; Moter1.1@2625.94,3249.06 ccw(c2572.68,3302.32) 2648,3302.32 ; Moter1.1@2633.01,3241.99 ccw(c2596.83,3278.17) 2648,3278.17 ; Moter1.1@2638.49,3252.93 cw(c2648,3250.07) 2648,3260 ; Moter1.1@2638.49,3267.07 ccw(c2648,3269.93) 2648,3260 ; v1(2733,3563) 2648,3478 2648,3260
  Bottom Layer w10: v1(2733,3563) 2760,3536 U1.18@2760,3502.09 ; 2748.06,3547.94 cw(c2735.66,3535.55) U1.18@2753.19,3535.55 ; 2749.14,3546.86 ccw(c2760,3557.72) U1.18@2760,3542.36
"MOTOR1 IN3": Moter1.3 U1.14 | length 1255.9
  Top Layer w10: Moter1.3@2790.47,3260 cw(c2731.26,3260) 2773.13,3218.13 cw(c2815,3176.26) Moter1.3@2815,3235.47 ; Moter1.3@2800.47,3260 cw(c2765.4,3260) 2790.2,3235.2 cw(c2815,3210.4) Moter1.3@2815,3245.47 ; v1(2811,3608) 2690,3608 2620,3538 2620,3462 2568,3410 2568,3229 2580,3217 2772,3217 Moter1.3@2815,3260
  Bottom Layer w10: v1(2811,3608) 2831,3608 2878,3561 2950,3561 ; U1.14@2953.86,3538.49 ccw(c2936.02,3547.02) 2950,3561 ; U1.14@2955.41,3540.58 ccw(c2945.88,3551) 2960,3551 ; U1.14@2960,3502.09 2960,3551 ; U1.14@2962.88,3534.17 ccw(c2949.54,3540.55) 2959.99,3551.01 ; U1.14@2964.59,3540.58 cw(c2974.12,3551) 2960,3551 ; 2950,3561 2960,3551
"MOTOR1 IN4": Moter1.4 U1.12 | length 415.5
  Top Layer w10: Moter1.4@2915,3260 2948,3293 ; Moter1.4@2919.45,3284.12 ccw(c2925.28,3315.72) 2948,3293 ; Moter1.4@2939.12,3264.45 cw(c2970.72,3270.28) 2948,3293 ; v1@2948,3383 2948,3293
  Bottom Layer w10: v1(2950,3385) 2998,3385 3060,3447 U1.12@3060,3502.09 ; U1.12@3055.18,3463.81 cw(c3043.56,3452.18) 3060,3452.18 cw(c3076.44,3452.18) U1.12@3064.82,3463.81
Netbell1_2: bell1.2 Q1.3 | length 630.5
  Top Layer w10: bell1.2@3865.47,3725 ccw(c3806.26,3725) 3848.13,3766.87 ccw(c3890,3808.74) bell1.2@3890,3749.53 ; bell1.2@3875.47,3725 ccw(c3840.4,3725) 3865.2,3749.8 ccw(c3890,3774.6) bell1.2@3890,3739.53 ; bell1.2@3890,3725 3807,3808 3807,4018 3894,4018 3906,4030 Q1.3@3931.26,4030 ; Q1.3@3919.55,4025.18 ccw(c3907.93,4013.56) 3907.93,4030 ccw(c3907.93,4046.44) Q1.3@3919.55,4034.82
NetC3_1: 470PF.1 U3.3 | length 317.3
  Bottom Layer w10: U3.3@6156.89,4355 6204,4355 ; U3.3@6188.39,4348.19 cw(c6188.39,4294.05) 6226.67,4332.33 ; U3.3@6188.39,4358.19 cw(c6188.39,4328.19) 6209.6,4349.4 ; U3.3@6193.38,4350.37 cw(c6204,4340.51) 6204,4355 ; U3.3@6193.38,4359.63 ccw(c6204,4369.49) 6204,4355 ; 470PF.1@6299.39,4314.39 ccw(c6273.79,4288.79) 6273.79,4325 ccw(c6273.79,4361.21) 470PF.1@6299.39,4335.61 ; 470PF.1@6315,4325 6234,4325 6204,4355
NetCON1_1: CON1.1 S1.1 | length 947.3
  Bottom Layer w80: S1.1@5692,3616 5714,3616 5972,3358 CON1.1@6051,3358 ; 5765.99,3564.01 ccw(c6051,3849.01) CON1.1@6051,3445.95 ; 5902.56,3427.44 ccw(c6051,3575.88) CON1.1@6051,3365.95
NetD1_1: D1.1@5810,3810 R1.1@5810,3913 | length 159.9
  Top Layer w10: R1.1@5799.39,3897.39 cw(c5773.79,3871.79) 5810,3871.79 cw(c5846.21,3871.79) R1.1@5820.61,3897.39 ; D1.1@5810,3810 R1.1@5810,3913
NetD2_1: 330UF.2 IN5819.1 U3.1 | length 722.4
  Top Layer w10: 330UF.2@6199.29,4452.75 ccw(c6188.27,4476) v1@6214,4476 ; v1(6205,4485) v1@6214,4476 ; 330UF.2@6214,4402 v1@6214,4476 ; 330UF.2@6228.71,4452.75 cw(c6239.73,4476) v1@6214,4476
  Bottom Layer w10: IN5819.1@6046.42,4535 6063,4535 6106,4578 ; IN5819.1@6046.42,4540 ccw(c6052.27,4576.38) 6078.32,4550.32 ; IN5819.1@6048.01,4549.87 ccw(c6056.1,4600.22) 6092.16,4564.16 ; IN5819.1@6049.59,4559.75 ccw(c6059.94,4624.06) 6106,4578 ; U3.1@6156.89,4455 6205,4455 v1(6205,4485) ; U3.1@6186.73,4461.61 ccw(c6180.89,4485) v1(6205,4485) ; U3.1@6189.16,4451.91 ccw(c6184.09,4472.19) v1@6205,4472.19 ; U3.1@6193.2,4450.18 cw(c6204.83,4438.56) 6204.83,4455 cw(c6204.83,4471.44) U3.1@6193.2,4459.82 ; 6106,4578 6205,4578 v1(6205,4485)
NetD3_1: 33UH.1 D3.1@4665,3990 U2.2 | length 1225
  Top Layer w10: v1(4353.07,4064) 4524,4064 33UH.1@4524,4095 4629,3990 ; 4413.71,4064 ccw(c4413.71,4185.61) 33UH.1@4499.7,4099.62 ; 4437.85,4064 ccw(c4437.85,4161.47) 33UH.1@4506.77,4092.55 ; 4461.99,4064 ccw(c4461.99,4137.32) 33UH.1@4513.84,4085.48 ; 4468.34,4064 cw(c4468.34,4019.66) 33UH.1@4499.7,4051.01 ; 33UH.1@4486.13,4064 ccw(c4486.13,4113.18) 33UH.1@4520.91,4078.41 ; 33UH.1@4524,4040.94 cw(c4524,3910.44) 4616.28,4002.72 ; 33UH.1@4524,4050.94 cw(c4524,3944.59) 4599.21,4019.79 ; 33UH.1@4524,4060.94 cw(c4524,3978.73) 4582.14,4036.86 ; 33UH.1@4524,4070.94 cw(c4524,4012.87) 4565.06,4053.94 ; 33UH.1@4558.37,4075.32 ccw(c4593.82,4075.32) 4568.75,4050.25 ; D3.1@4641.78,3981.76 ccw(c4629,3975.98) 4629,3990 ; D3.1@4641.78,3998.24 cw(c4629,4004.02) 4629,3990 ; D3.1@4665,3990 4629,3990
  Bottom Layer w10: U2.2@4338.51,4116.15 cw(c4303.36,4081) 4353.07,4081 cw(c4402.78,4081) U2.2@4367.63,4116.15 ; v1(4353.07,4064) U2.2@4353.07,4165.16
NetD5_1: D5.1@5810,4016 R30.1 | length 216.8
  Top Layer w10: D5.1@5799.39,4031.61 ccw(c5773.79,4057.21) 5810,4057.21 ccw(c5846.21,4057.21) D5.1@5820.61,4031.61 ; R30.1@5799.39,4103.39 cw(c5773.79,4077.79) 5810,4077.79 cw(c5846.21,4077.79) R30.1@5820.61,4103.39 ; D5.1@5810,4016 R30.1@5810,4119
NetD6_1: D6.1 R31.1 | length 216.8
  Top Layer w10: D6.1@5799.39,4237.61 ccw(c5773.79,4263.21) 5810,4263.21 ccw(c5846.21,4263.21) D6.1@5820.61,4237.61 ; R31.1@5799.39,4309.39 cw(c5773.79,4283.79) 5810,4283.79 cw(c5846.21,4283.79) R31.1@5820.61,4309.39 ; D6.1@5810,4222 R31.1@5810,4325
NetL1_1: 0.22R.1 180R.2 330UF.1 U3.7 | length 1062.1
  Top Layer w10: v1@5866.2,4348 ccw(c5866.2,4401.33) 330UF.1@5917.54,4386.91 ; 5879.39,4348 ccw(c5879.39,4397.62) 330UF.1@5927.17,4384.2 ; 5892.59,4348 ccw(c5892.59,4393.91) 330UF.1@5936.79,4381.5 ; 330UF.1@5905.79,4348 ccw(c5905.79,4390.21) 330UF.1@5946.42,4378.79 ; 330UF.1@5907.91,4389.61 cw(c5853,4405.03) v1(5853,4348) 5941,4348 330UF.1@5941,4400
  Bottom Layer w10: 0.22R.1@5824.39,4315.61 ccw(c5798.79,4341.21) 5835,4341.21 ccw(c5871.21,4341.21) 0.22R.1@5845.61,4315.61 ; 180R.2@5824.39,4394.39 cw(c5798.79,4368.79) 5835,4368.79 cw(c5871.21,4368.79) 180R.2@5845.61,4394.39 ; 180R.2@5830.6,4393.31 cw(c5792.97,4346.54) v1@5853,4346.54 ; 0.22R.1@5835,4305 5835,4355 180R.2@5835,4405 180R.2@5853,4405 ; 180R.2@5836.87,4401.1 cw(c5809.77,4367.42) 5853,4367.42 ; 180R.2@5843.13,4408.9 cw(c5826.56,4388.3) 180R.2@5853,4388.3 ; 180R.2@5850.61,4394.39 cw(c5876.21,4368.79) 5876.21,4405 cw(c5876.21,4441.21) 180R.2@5850.61,4415.61 ; v1(5853,4348) 180R.2@5853,4405 ; U3.7@5929.63,4400.18 ccw(c5918.01,4388.56) 5918.01,4405 ccw(c5918.01,4421.44) U3.7@5929.63,4409.82 ; U3.7@5965.95,4405 180R.2@5853,4405
NetQ1_2: Q1.2 R2.2@3720,4065 | length 202.4
  Top Layer w10: R2.2@3720,4065 3778,4065 3780.4,4067.4 Q1.2@3838.74,4067.4 ; R2.2@3735.61,4054.39 cw(c3761.21,4028.79) 3761.21,4065 cw(c3761.21,4101.21) R2.2@3735.61,4075.61 ; Q1.2@3827.03,4062.59 ccw(c3815.41,4050.96) 3815.41,4067.4 ccw(c3815.41,4083.85) Q1.2@3827.03,4072.22
NetR14_1: 180R.1 U3.8 | length 226.1
  Bottom Layer w10: 180R.1@5835,4485 5885,4485 5915,4455 U3.8@5965.95,4455 ; 180R.1@5850.61,4474.39 cw(c5876.21,4448.79) 5876.21,4485 cw(c5876.21,4521.21) 180R.1@5850.61,4495.61 ; U3.8@5929.63,4450.18 ccw(c5918.01,4438.56) 5918.01,4455 ccw(c5918.01,4471.44) U3.8@5929.63,4459.82
NetR15_1: R1.1@6060,4220 R2.1@5950,4220 U3.5 | length 405.6
  Bottom Layer w10: U3.5@5929.63,4300.18 cw(c5880.47,4251.02) 5950,4251.02 ; U3.5@5936.7,4307.25 cw(c5904.61,4275.16) 5950,4275.16 ; R2.1@5939.39,4230.61 ccw(c5913.79,4256.21) 5950,4256.21 ccw(c5986.21,4256.21) R2.1@5960.61,4230.61 ; U3.5@5965.95,4305 5950,4289.05 R2.1@5950,4220 R1.1@6060,4220 ; R1.1@6049.39,4209.39 ccw(c6023.79,4183.79) 6023.79,4220 ccw(c6023.79,4256.21) R1.1@6049.39,4230.61
PTA5: *.4 K1.68 | length 741.2
  Top Layer w10: K1.68@4807.29,3929.45 ccw(c4800,3927.42) 4800,3934.99 ; K1.68@4807.29,3940.52 cw(c4800,3942.56) 4800,3934.99 ; K1.68@4835,3934.99 4800,3934.99 ; *.4@5120.47,3700 ccw(c5061.26,3700) 5103.13,3741.87 ccw(c5145,3783.74) *.4@5145,3724.53 ; *.4@5130.47,3700 ccw(c5095.4,3700) 5120.2,3724.8 ccw(c5145,3749.6) *.4@5145,3714.53 ; *.4@5145,3700 5071,3774 4814,3774 4788,3800 4788,3922.99 4800,3934.99
PTA7: CSB.6 K1.70 | length 990.3
  Bottom Layer w10: K1.70@4835,4035 4860,4060 4860,4131 4920,4191 5144.06,4191 5190.53,4237.47 5443.47,4237.47 CSB.6@5520,4314 ; CSB.6@5495.47,4314 cw(c5436.26,4314) 5478.13,4272.13 cw(c5520,4230.26) CSB.6@5520,4289.47 ; CSB.6@5505.47,4314 cw(c5470.4,4314) 5495.2,4289.2 cw(c5520,4264.4) CSB.6@5520,4299.47
PTA8: CSB.5 K1.71 | length 1058.9
  Bottom Layer w10: K1.71@4935,4135 5270,4135 5354.47,4219.47 5525.47,4219.47 CSB.5@5620,4314 ; K1.71@4945.61,4124.39 cw(c4971.21,4098.79) 4971.21,4135 cw(c4971.21,4171.21) K1.71@4945.61,4145.61 ; K1.71@4952.68,4117.32 cw(c4995.36,4074.64) 4995.36,4135 cw(c4995.36,4195.36) K1.71@4952.68,4152.68 ; CSB.5@5595.47,4314 cw(c5536.26,4314) 5578.13,4272.13 cw(c5620,4230.26) CSB.5@5620,4289.47 ; CSB.5@5605.47,4314 cw(c5570.4,4314) 5595.2,4289.2 cw(c5620,4264.4) CSB.5@5620,4299.47
PTA10: BMQ2.3 K1.73 | length 1177.7
  Top Layer w10: v1(5370,4290) 5370,4016 5421,3965 BMQ2.3@5495,3965 ; BMQ2.3@5477.66,3947.66 ccw(c5435.79,3905.79) 5435.79,3965 ccw(c5435.79,4024.21) BMQ2.3@5477.66,3982.34 ; BMQ2.3@5484.73,3954.73 ccw(c5459.93,3929.93) 5459.93,3965 ccw(c5459.93,4000.07) BMQ2.3@5484.73,3975.27
  Bottom Layer w10: K1.73@4935,4234.99 5146.99,4234.99 5176,4264 5344,4264 v1(5370,4290) ; K1.73@4945.61,4224.38 cw(c4971.21,4198.77) 4971.21,4234.99 cw(c4971.21,4271.2) K1.73@4945.61,4245.59 ; K1.73@4952.68,4217.31 cw(c4995.36,4174.63) 4995.36,4234.99 cw(c4995.36,4295.34) K1.73@4952.68,4252.67
PTA11: BMQ2.4 K1.74 | length 1399.9
  Bottom Layer w10: K1.74@4810,4234.99 cw(c4749.64,4234.99) 4792.32,4192.31 cw(c4835,4149.63) K1.74@4835,4209.99 ; K1.74@4820,4234.99 cw(c4783.79,4234.99) 4809.39,4209.38 cw(c4835,4183.77) K1.74@4835,4219.99 ; K1.74@4835,4234.99 4792,4191.99 4792,4010 4810,3992 4950,3992 5020,3922 5552,3922 BMQ2.4@5595,3965 ; BMQ2.4@5570.47,3965 cw(c5511.26,3965) 5553.13,3923.13 cw(c5595,3881.26) BMQ2.4@5595,3940.47 ; BMQ2.4@5580.47,3965 cw(c5545.4,3965) 5570.2,3940.2 cw(c5595,3915.4) BMQ2.4@5595,3950.47
PTA12: BMQ1.3 K1.75 | length 795.6
  Top Layer w10: K1.75@4935,4335 4982,4288 ; K1.75@4942.87,4314.41 cw(c4942.87,4283.71) 4964.58,4305.42 ; K1.75@4953.46,4334.72 ccw(c4994.72,4333.65) 4965.54,4304.46 ; K1.75@4963.46,4334.46 ccw(c5026.81,4332.81) 4982,4288 ; BMQ1.3@5152.66,3952.66 ccw(c5110.79,3910.79) 5110.79,3970 ccw(c5110.79,4029.21) BMQ1.3@5152.66,3987.34 ; BMQ1.3@5159.73,3959.73 ccw(c5134.93,3934.93) 5134.93,3970 ccw(c5134.93,4005.07) BMQ1.3@5159.73,3980.27 ; BMQ1.3@5170,3970 5040,3970 4982,4028 4982,4288
PTA13: BMQ1.4 K1.76 | length 974.5
  Top Layer w10: K1.76@4835,4335 4865,4335 4865,4297 4888,4274 v1(4888,4082) ; K1.76@4842.57,4324.41 cw(c4841.9,4301.32) 4865,4301.32 ; K1.76@4842.86,4334.41 cw(c4842.2,4311.62) 4865,4311.62 ; K1.76@4843.15,4344.4 cw(c4842.5,4321.91) 4865,4321.91
  Bottom Layer w10: v1(4888,4082) 4970,4082 5025,4027 5213,4027 BMQ1.4@5270,3970 ; BMQ1.4@5245.47,3970 ccw(c5186.26,3970) 5228.13,4011.87 ccw(c5270,4053.74) BMQ1.4@5270,3994.53 ; BMQ1.4@5255.47,3970 ccw(c5220.4,3970) 5245.2,3994.8 ccw(c5270,4019.6) BMQ1.4@5270,3984.53
PTA17: HW.3 K1.80 | length 744
  Top Layer w10: K1.80@4835,4535 4978,4535 5033,4480 v1(5033,4280) ; K1.80@4857.43,4520.44 cw(c4892.58,4485.29) 4892.58,4535 cw(c4892.58,4584.71) K1.80@4857.43,4549.56
  Bottom Layer w10: v1(5033,4280) HW.3@5130,4280 ; HW.3@5112.66,4262.66 ccw(c5070.79,4220.79) 5070.79,4280 ccw(c5070.79,4339.21) HW.3@5112.66,4297.34 ; HW.3@5119.73,4269.73 ccw(c5094.93,4244.93) 5094.93,4280 ccw(c5094.93,4315.07) HW.3@5119.73,4290.27
PTA19: K1.82 oled1.6 | length 1838
  Bottom Layer w10: K1.82@4935,4635 4967.76,4602.24 ; K1.82@4940.07,4610.52 cw(c4946.24,4580.72) 4967.76,4602.24 ; K1.82@4959.48,4629.93 ccw(c4989.28,4623.76) 4967.76,4602.24 ; oled1.6@6330,4225 6353,4248 6353,4445 6340,4458 6280,4458 6233,4505 6233,4593 6223.76,4602.24 4967.76,4602.24
PTA24: K1.84 oled1.5 | length 2141.4
  Top Layer w10: v1(5951,4501) 5960,4501 6000,4461 oled1.5@6330,4125 ; oled1.5@6305.47,4125.22 ccw(c6246.26,4125.75) 6288.51,4167.25 ccw(c6330.75,4208.74) oled1.5@6330.22,4149.53 ; oled1.5@6315.47,4125.13 ccw(c6280.4,4125.45) 6305.42,4150.02 ccw(c6330.45,4174.6) oled1.5@6330.13,4139.53
  Bottom Layer w10: K1.84@4834.27,4639.95 cw(c4841.36,4591.77) 4875.8,4626.2 ; K1.84@4835,4635 4867,4635 ; K1.84@4835.73,4630.05 cw(c4844.97,4567.25) 4889.86,4612.14 ; K1.84@4837.18,4620.16 cw(c4848.58,4542.72) 4903.93,4598.07 ; K1.84@4838.64,4610.27 cw(c4852.2,4518.2) 4918,4584 ; K1.84@4859.26,4628.95 cw(c4867,4627.02) 4867,4635 ; K1.84@4859.26,4641.05 ccw(c4867,4642.98) 4867,4635 ; v1(5951,4501) 5868,4584 4918,4584 ; 4867,4635 4918,4584